# Altium PCB 基于STM32的DDS信号源的设计实例.PcbDoc
Units mil, origin at the board's own origin, x right, y up, seen from the top; angles counter-clockwise.
Board outline 3937.01 x 2755.91 mil, 2 copper layers (Top Layer, Bottom Layer); 61 components, 55 nets, 261 pads, 44 vias.
Unrouted connection lines stored in the file: 3.
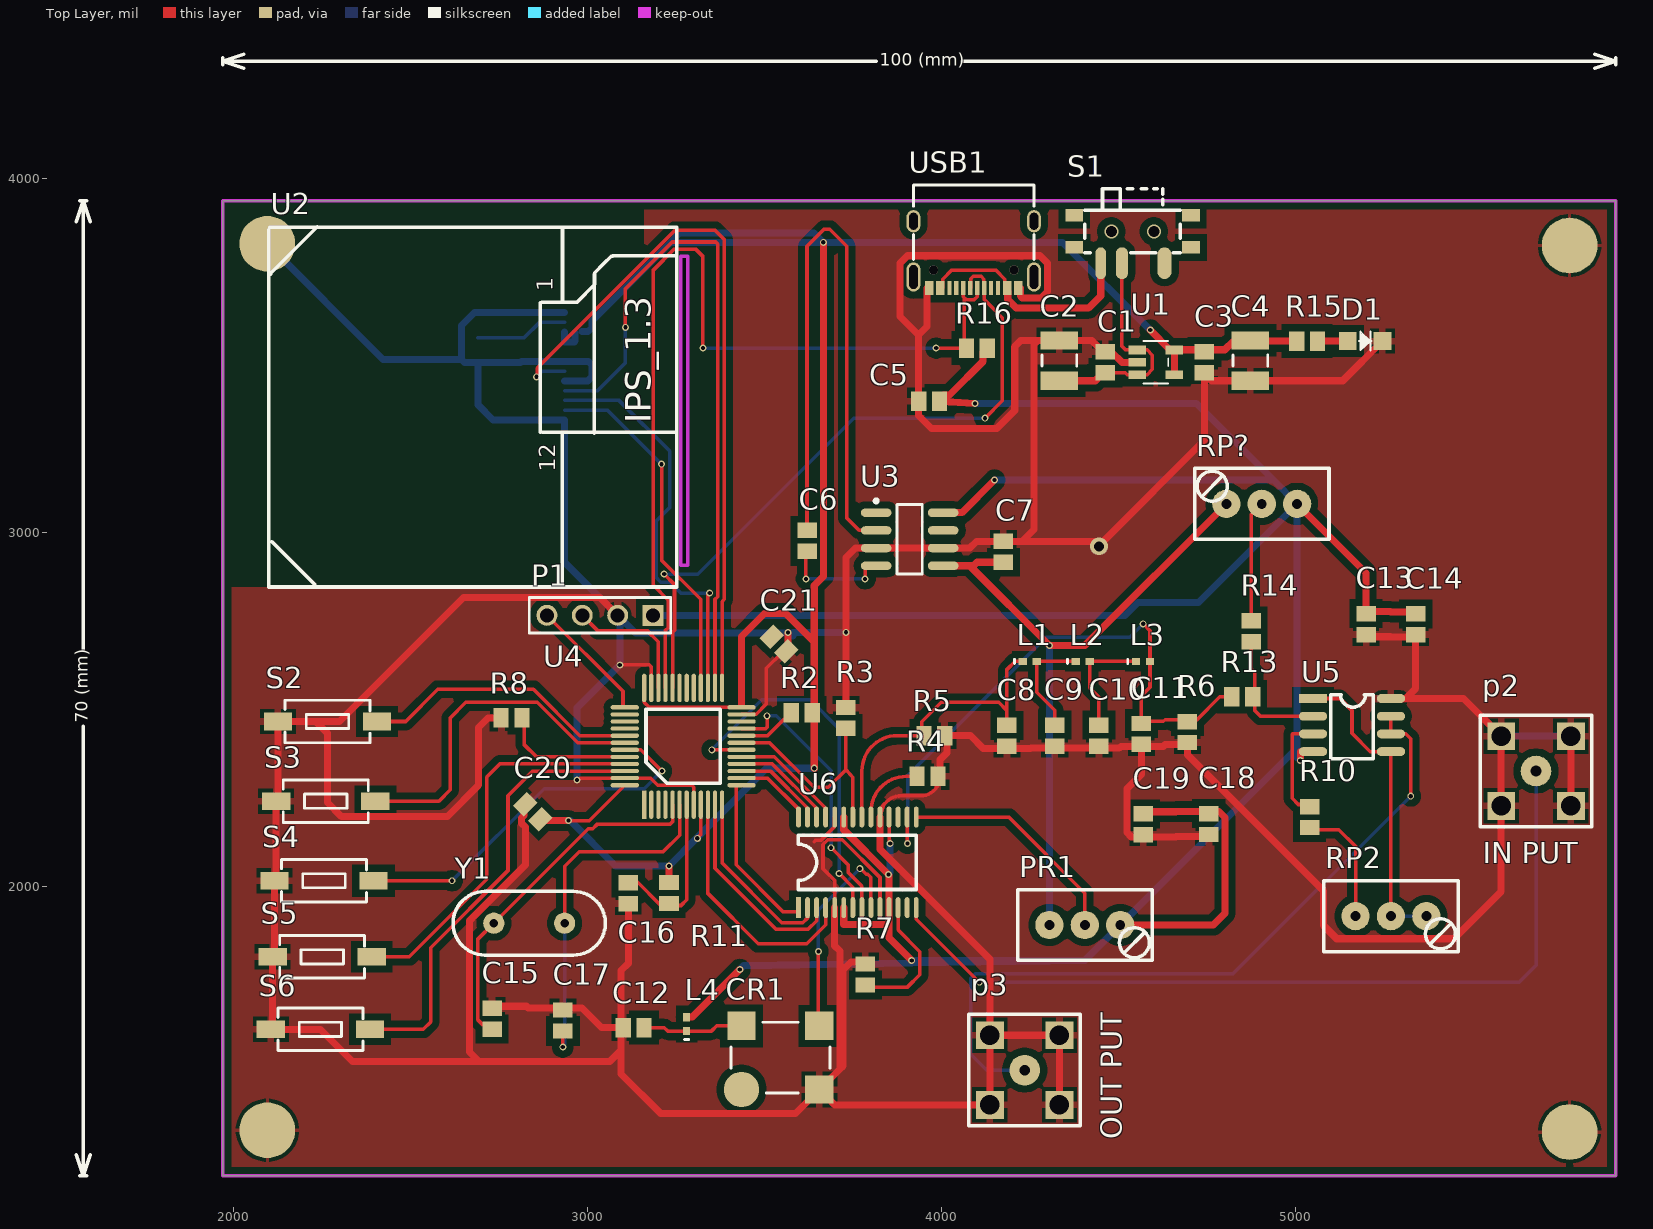
[diagram p0: Top Layer view]
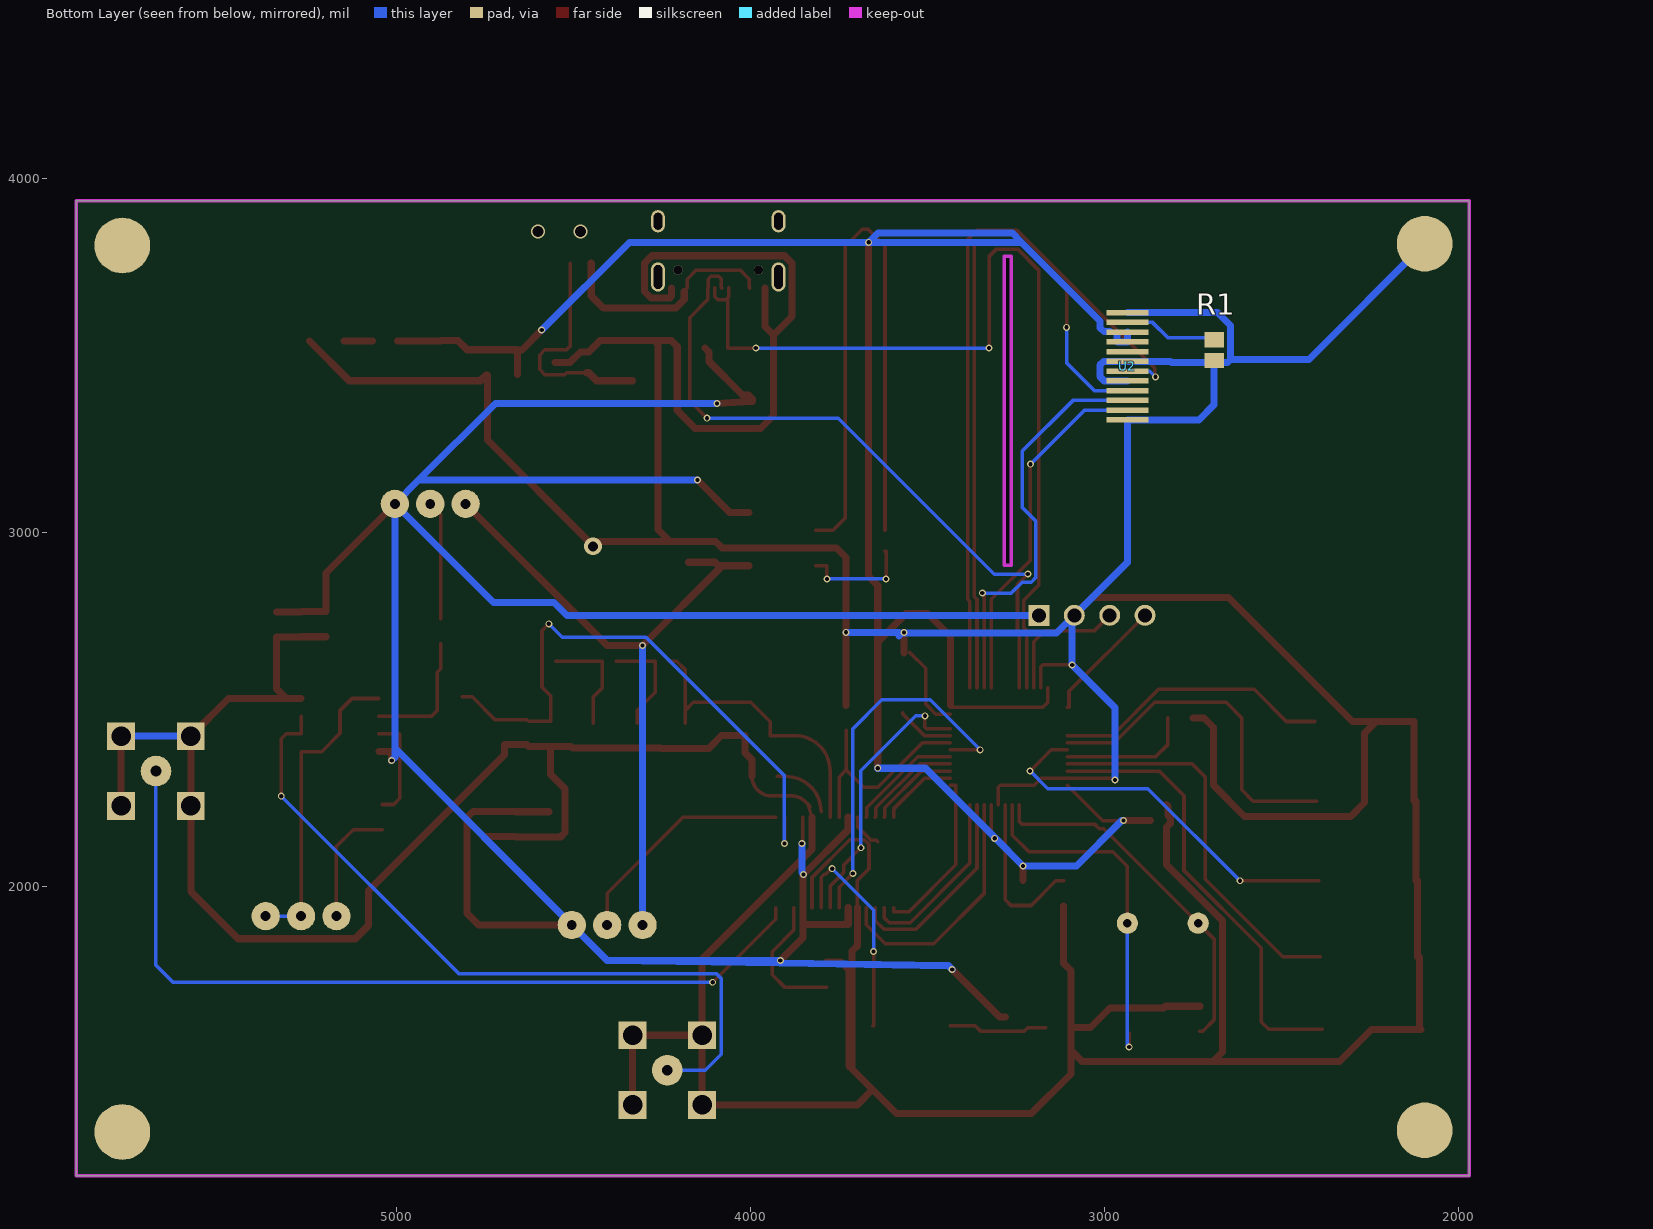
[diagram p1: Bottom Layer view, seen from below]

## Layer stack, top to bottom
Top Solder: solder mask 0.4, Solder Resist, Dk 3.5
Top Layer: signal copper 1.4
Dielectric 1: dielectric 12.6, FR-4, Dk 4.8
Bottom Layer: signal copper 1.4
Bottom Solder: solder mask 0.4, Solder Resist, Dk 3.5

## Board outline
1968.5,1181.1 1968.5,3937.01 5905.51,3937.01 5905.51,1181.1
cut-out: 3264.08,2905.92 3284.08,2905.92 3284.08,3779.54 3285,3780 3264.08,3780

## Design rules (kind name [scope] priority, off if disabled: settings)
Clearance Clearance_PL [InPolygon] p1: gap=20 ignorepadtopadclearanceinfootprint=FALSE
Clearance [All] p2: gap=8 ignorepadtopadclearanceinfootprint=FALSE
PolygonConnect PolygonConnect_VIA [IsVia] p1: connectstyle=Direct reliefconductorwidth=10 reliefentries=4 polygonreliefangle="90 Angle" airgapwidth=10
PolygonConnect [All] p2: connectstyle=Relief reliefconductorwidth=20 reliefentries=4 polygonreliefangle="90 Angle" airgapwidth=10
RoutingVias [All] p1: holewidth=11.81 width=19.68 viastyle="Through Hole" minholewidth=11.81 minwidth=19.68 maxholewidth=11.81 maxwidth=19.68
SolderMaskExpansion [All] p1: expansion=4 istentingtop=FALSE
SupplyNets "Schematic Supply Nets_4" [InNet('+5')] p1: voltage=0.000
SupplyNets "Schematic Supply Nets_3" [InNet('-5')] p2: voltage=0.000
SupplyNets "Schematic Supply Nets_2" [InNet('GND')] p3: voltage=0.000
SupplyNets "Schematic Supply Nets_1" [InNet('VCC')] p4: voltage=0.000
SupplyNets "Schematic Supply Nets" [InNet('+5VIN')] p5: voltage=0.000
Width Width_+5VIN [InNet('+5VIN')] p1: maxlimit=100 minlimit=10 preferedwidth=10 minimp=50.000000 maximp=50.000000 favimp=50.000000
Width Width_-5 [InNet('-5')] p2: maxlimit=100 minlimit=10 preferedwidth=20 minimp=50.000000 maximp=50.000000 favimp=50.000000
Width Width_+5 [InNet('+5')] p3: maxlimit=100 minlimit=10 preferedwidth=20 minimp=50.000000 maximp=50.000000 favimp=50.000000
Width Width_GND [InNet('GND')] p4: maxlimit=100 minlimit=10 preferedwidth=10 minimp=50.000000 maximp=50.000000 favimp=50.000000
Width Width_VCC [InNet('VCC')] p5: maxlimit=100 minlimit=10 preferedwidth=10 minimp=50.000000 maximp=50.000000 favimp=50.000000
Width [All] p6: maxlimit=100 minlimit=5 preferedwidth=10 minimp=50.000000 maximp=50.000000 favimp=50.000000
30 further rules are at their usual default settings.

## Components (designator, comment, footprint, x,y, rotation, side; value= is the part's Value field where it differs from the comment)
C1 "Cap" C0805 4463,3480 r90 top value=104
C2 "Cap Pol1" C1210_N 4333,3485 r90 top value=22UF
C3 "Cap" C0805 4743,3480 r270 top value=104
C4 "Cap Pol1" C1210_N 4873,3485 r270 top value=22UF
C5 "Cap" C0805 3965,3370 r180 top value=106
C6 "Cap" C0805 3620,2975.47 r270 top value=106
C7 "Cap" C0805 4175,2944.53 r90 top value=106
C8 "Cap" C0805 4185,2424.57 r90 top value=33pF
C9 "Cap" C0805 4320,2425 r90 top value=22pF
C10 "Cap" C0805 4445,2425 r90 top value=22pF
C11 "Cap" C0805 4565,2430 r90 top value=22pF
C12 "Cap" C0805 3130,1600 r0 top value=104
C13 "Cap" C0805 5200,2740 r90 top value=106
C14 "Cap" C0805 5340,2739.57 r90 top value=104
C15 "Cap" C0805 2730,1625 r270 top value=20pF
C16 "Cap" C0805 3115,1979.57 r90 top value=104
C17 "Cap" C0805 2930,1620 r90 top value=20pF
C18 "Cap" C0805 4755,2175 r90 top value=104
C19 "Cap" C0805 4570,2174.57 r90 top value=106
C20 "Cap" C0805 2845,2210 r315 top value=104
C21 "Cap" C0805 3540.88,2684.12 r135 top value=104
CR1 "30MHZ" CRYSTAL-SMT-5X7 3435,1425 r0 top
D1 "LED2" D0805+ 5148,3540 r0 top
L1 "Inductor" 0402-A 4249.5,2635 r0 top value=470mH
L2 "Inductor" 0402-A 4399.5,2635 r0 top value=390mH
L3 "Inductor" 0402-A 4569.5,2635 r0 top value=390mH
L4 "Inductor" 0402-A 3280,1610 r90 top
P1 "Header 4" HDR1X4 3185,2765 r180 top
p2 "SMA" SMA-KE 5680,2325 r0 top
p3 "SMA" SMA-KE 4235,1480 r0 top
PR1 "POT2" VR7 4405,1890 r0 top
R1 "Res2" C0805 2690,3514.57 r90 bottom value=10
R2 "Res2" C0805 3605,2490 r180 top value=10K
R3 "Res2" C0805 3730,2475 r90 top value=10K
R4 "Res2" C0805 3960.43,2310 r180 top value=24
R5 "Res2" C0805 3980,2425 r180 top value=200
R6 "Res2" C0805 4695,2435 r90 top value=200
R7 "Res2" C0805 3785,1750 r90 top value=3.9K
R8 "Res2" C0805 2785,2475 r180 top value=10K
R10 "Res2" C0805 5040,2195 r90 top value=49.9
R11 "Res2" C0805 3230,1980.43 r90 top value=10K
R13 "Res2" C0805 4850,2535 r180 top value=49.9
R14 "Res2" C0805 4875,2720 r90 top value=49.9
R15 "Res2" C0805 5033,3540 r180 top value=10K
R16 "Res2" C0805 4100,3520 r0 top value=10K
RP2 "POT2" VR7 5270,1915 r0 top
RP? "POT2" VR7 4905,3080 r180 top
S1 "SW-SPDT" SW-SPDT-7P 4450,3760 r0 top
S2 "KEY" SW-MINI 2145,2465 r0 top
S3 "KEY" SW-MINI 2140,2240 r0 top
S4 "KEY" SW-MINI 2135,2015 r0 top
S5 "KEY" SW-MINI 2130,1800 r0 top
S6 "KEY" SW-MINI 2125,1595 r0 top
U1 "XC6219B332" SOT23-5L 4553,3480 r270 top
U2 "1.3寸TFT液晶" 1.3-TFT-TPS 2934.7,3620.61 r0 top
U3 "ICL7660" SO8_N 3910,2980 r0 top
U4 "STM32F103C8" TQFP-48 3160,2230 r90 top
U5 "OPA269" SO-8 5050,2530 r0 top
U6 "AD9851" TSSOP28 3595.87,1939.09 r90 top
USB1 "TYPE-C" TYPE-C 3920.83,3878.58 r0 top
Y1 "XTAL" XTAL2 2835,1895 r180 top

## Footprints (in the part's own frame and the unit in brackets; to place one, negate y for a bottom-side part, rotate by r counter-clockwise, add the part's x,y. Pads: shape width x height; smd on the part's side, far side on the other; paste and mask are expansions set on the pad)
1.3-TFT-TPS [mm]
  rect 3x0.4 smd far side: 1(0,0) 2(0.008,-0.709) 3(0.008,-1.409) 4(0.008,-2.109) 5(0.008,-2.809) 6(0.008,-3.509) 7(0.008,-4.209) 8(0.008,-4.909) 9(0.008,-5.609) 10(0.008,-6.309) 11(0.008,-7.009) 12(0.008,-7.709)
  Keep-Out Layer lines w0.254: 8.339,-18.123 8.339,4.051 8.847,4.051 8.847,-18.123 8.339,-18.123
  silkscreen extent -21.22,-19.72 8.06,6.16
0402-A [mm] "Chip Inductor, Body 1.0x0.5mm, IPC High Density"
  rect 0.6x0.5 smd: 1(-0.5,0) 2(0.5,0)
  silkscreen extent -1.1,-0.15 -1.1,0.15, body extent -0.55,-0.3 0.55,0.3, height 0.55
C0805 [mm] "Chip Capacitor, Body 2.0x1.3mm, IPC High Density"
  rect 1.1x1.4 smd: 1(-0.75,0) 2(0.75,0)
  body extent -1.1,-0.72 1.1,0.72, height 1.4
C1210_N [mm] "Chip Capacitor, Body 3.2x2.5mm, IPC Medium Density"
  rect 1.3x2.7 smd: 1(-1.45,0) 2(1.45,0)
  silkscreen extent -0.4,-1.25 0.4,1.25, body extent -1.7,-1.35 1.7,1.35, height 1.5
CRYSTAL-SMT-5X7 [mil]
  round 100 smd: 1(0,0)
  rect 80x80 smd: 4(220,0) 5(220,180) 8(0,180)
  silkscreen extent -30,-10 250,190
D0805+ [mil]
  rect 50x50 smd: A(0,0) K(98,0)
  silkscreen extent 31,-27 68,27
HDR1X4 [mm]
  rect 1.5x1.5 hole 1 paste-2539.97: 1(0,0)
  round 1.5 hole 1 paste-2539.97: 2(2.54,0) 3(5.08,0) 4(7.62,0)
  silkscreen extent -1.27,-1.27 8.89,1.27
SMA-KE [mm]
  round 2.2 hole 0.762: 1(0,0)
  rect 2x2 hole 1.4: 2(2.5,2.5) 3(2.5,-2.5) 4(-2.5,-2.5) 5(-2.5,2.5)
  silkscreen extent -4,-4 4,4
SO8_N [mm] "SOIC, 8-Leads, Body 4.9x3.9mm, Pitch 1.27mm, IPC Medium Density"
  oval 2.2x0.6 smd: 1(-2.4,1.905) 2(-2.4,0.635) 3(-2.4,-0.635) 4(-2.4,-1.905) 5(2.4,-1.905) 6(2.4,-0.635) 7(2.4,0.635) 8(2.4,1.905)
  silkscreen extent -2.52,-2.5 0.9,2.88, body extent -2,-2.5 2,2.5, height 1.75
SO-8 [mil]
  rect 80x25 / inner round 60 / far side round 0 all layers, no hole: 1(0,0)
  oval 80x25 / inner round 60 / far side round 0 all layers, no hole: 2(0,-50) 3(0,-100) 4(0,-150) 5(220,-150) 6(220,-100) 7(220,-50) 8(220,0)
  silkscreen extent 50,-170 170,11
SOT23-5L [mil]
  rect 25x50 smd: 1(-35,0) 2(0,0) 3(35,0) 4(35,105) 5(-35,105)
  silkscreen extent -60,18 60,88
SW-MINI [mil]
  rect 80x50 smd: 1(-20,0) 2(260,0)
  silkscreen extent 0,-60 240,60
SW-SPDT-7P [mil]
  oval 30x90 smd: 1(0,0)
  oval 35x90 smd: 2(60,0)
  oval 40x90 smd: 3(180,0)
  rect 50x35 smd: 4(255,45) 5(255,135) 6(-75,135) 7(-75,45)
  silkscreen extent -45,30 225,210
TQFP-48 [mil]
  rect 80x12 smd: 1(0,0)
  oval 80x12 smd: 2(0,-20) 3(0,-40) 4(0,-60) 5(0,-80) 6(0,-100) 7(0,-120) 8(0,-140) 9(0,-160) 10(0,-180) 11(0,-200) 12(0,-220) 25(330,-220) 26(330,-200) 27(330,-180) 28(330,-160) 29(330,-140) 30(330,-120) 31(330,-100) 32(330,-80) 33(330,-60) 34(330,-40) 35(330,-20) 36(330,0)
  oval 12x80 smd: 13(55,-275) 14(75,-275) 15(95,-275) 16(115,-275) 17(135,-275) 18(155,-275) 19(175,-275) 20(195,-275) 21(215,-275) 22(235,-275) 23(255,-275) 24(275,-275) 37(275,55) 38(255,55) 39(235,55) 40(215,55) 41(195,55) 42(175,55) 43(155,55) 44(135,55) 45(115,55) 46(95,55) 47(75,55) 48(55,55)
  silkscreen extent 60,-215 270,-5
TSSOP28 [mm]
  rect 1.5x0.35 / inner round 1.524 / far side round 0 all layers, no hole: 1(0,0)
  oval 1.5x0.35 / inner round 1.524 / far side round 0 all layers, no hole: 2(0,-0.65) 3(0,-1.3) 4(0,-1.95) 5(0,-2.6) 6(0,-3.25) 7(0,-3.9) 8(0,-4.55) 9(0,-5.2) 10(0,-5.85) 11(0,-6.5) 12(0,-7.15) 13(0,-7.8) 14(0,-8.45) 15(6.5,-8.45) 16(6.5,-7.8) 17(6.5,-7.15) 18(6.5,-6.5) 19(6.5,-5.85) 20(6.5,-5.2) 21(6.5,-4.55) 22(6.5,-3.9) 23(6.5,-3.25) 24(6.5,-2.6) 25(6.5,-1.95) 26(6.5,-1.3) 27(6.5,-0.65) 28(6.5,0)
  silkscreen extent 1.3,-8.45 5.2,0
TYPE-C [mm]
  round 0.65 hole 0.65: 0(1.435,-3.5) 0(7.215,-3.5)
  oval 1x1.6 hole 0.6 slot 1.2 at 90 deg: 1(0,0) 2(8.65,0)
  oval 1x2.1 hole 0.6 slot 1.7 at 90 deg: 3(8.65,-4) 4(0,-4)
  rect 0.3x1 smd: A1(7.675,-4.79) A4(6.875,-4.79) A5(5.575,-4.79) A6(4.575,-4.79) A7(4.075,-4.79) A8(3.075,-4.79) A9(1.775,-4.79) A12(0.975,-4.79) B1(1.275,-4.79) B4(2.075,-4.79) B5(2.575,-4.79) B6(3.575,-4.79) B7(5.075,-4.79) B8(6.075,-4.79) B9(6.575,-4.79) B12(7.375,-4.79)
  silkscreen extent 0,-2.74 8.65,2.6
VR7 [mil]
  round 80 hole 28: 1(-100,0) 2(100,0) 3(0,0)
  silkscreen extent -190,-100 190,100
XTAL2 [mil]
  round 60 hole 24: 1(-100,0) 2(100,0)
  silkscreen extent -215,-90 215,90

## Part data
C1 C3 C5 C6 C7 C8 C9 C10 C11 C12 C13 C14 C15 C16 C17 C18 C19 C20 C21: "Capacitor", LatestRevisionDate=17-Jul-2002, LatestRevisionNote="Re-released for DXP Platform.", PackageDescription="Radial Cap, Thru-Hole; 2 Leads; 0.3 in Pin Spacing", PackageReference=RAD-0.3, Published=8-Jun-2000, Publisher="Altium Limited"
C2 C4: "Polarized Capacitor (Radial)", LatestRevisionDate=17-Jul-2002, LatestRevisionNote="Re-released for DXP Platform.", PackageDescription="Polarized Capacitor (Radial); 2 Leads", PackageReference=RB7.6-15, Published=8-Jun-2000, Publisher="Altium Limited"
CR1: library part CRYSTAL-DIP8
D1: "Typical RED, GREEN, YELLOW, AMBER GaAs LED", LatestRevisionDate=17-Jul-2002, LatestRevisionNote="Re-released for DXP Platform.", PackageDescription="SM LED; 2 Flat Leads", PackageReference=3.2X1.6X1.1, PackageVersion=Feb-2002, Published=8-Jun-2000, Publisher="Altium Limited"
P1: "Header, 4-Pin", LatestRevisionDate=17-Jul-2002, LatestRevisionNote="Re-released for DXP Platform.", Publisher="Altium Limited"
PR1 RP2 RP?: "Potentiometer"
R1 R2 R3 R4 R5 R6 R7 R8 R10 R11 R13 R14 R15 R16: "Resistor", LatestRevisionDate=17-Jul-2002, LatestRevisionNote="Re-released for DXP Platform.", PackageDescription="Axial Device, Thru-Hole; 2 Leads; 0.4 in Pin Spacing", PackageReference=AXIAL-0.4, Published=8-Jun-2000, Publisher="Altium Limited"
S1: "SPDT Subminiature Toggle Switch, Right Angle Mounting, Vertical Actuation", ComponentLink1Description="Manufacturer Link", ComponentLink1URL=http://www.apem.com, DatasheetVersion=05-Dec-2000, LatestRevisionDate=17-Dec-2003, LatestRevisionNote="Schematic revised, PCB Footprint replaced.", PackageDescription="Switch; 4 Leads", PackageReference=TL36WW15050, Published=24-Mar-1999, Publisher="Altium Limited"
S2 S3 S4 S5 S6: library part SW-PB, "Switch", LatestRevisionDate=17-Jul-2002, LatestRevisionNote="Re-released for DXP Platform.", PackageDescription="Switch; 2 Leads", PackageReference=SPST-2, Published=24-Mar-1999, Publisher="Altium Limited"
U1: library part XC6219
U4: "Flaah:64/RAM:20/IO:36", BOM名称=32位STM单片机, 学习资源=www.ooocke.com, 版权归属=源创客
Y1: "Crystal Oscillator", LatestRevisionDate=17-Jul-2002, LatestRevisionNote="Re-released for DXP Platform.", PackageDescription="Crystal, Thru-Hole; 2 Leads; Body 3.1 x 8.2 mm (Dia.xH)", PackageReference=R38, Published=8-Jun-2000, Publisher="Altium Limited"
L1 L2 L3 L4: Code_IEC=1005, Code_JEITA=0402, LatestRevisionDate=29-May-2009, LatestRevisionNote="IPC-7351 Footprint Added.", PackageDescription="Chip Inductor", PackageReference=0402-A, Published=8-Jun-2000, Publisher="Altium Limited"

## Free pads (board coordinates)
  round 157.48 all layers, no hole paste-99999: 3(2095,1310) 3(2095,3815) 3(5775,1305) 3(5775,3810)

## Via types
v1: diameter 19.68, hole 11.81, Top Layer to Bottom Layer, 41 vias
v2: diameter 39.37, hole 31.5, Top Layer to Bottom Layer, 2 vias
v3: diameter 50, hole 28, Top Layer to Bottom Layer, 1 vias

## Nets (pads, with @x,y where several pads share a name; then routed paths per layer and width w, separated by ;. In a path a pad name is that pad's centre, name@x,y a point inside that pad or via, vN(x,y) a via of type N, cw(c..) or ccw(c..) an arc to the next point about the centre after c; other vN are vias at no path point)
+5: C5.1 C13.2 C14.2 C18.2 C19.2 L4.2 P1.1 PR1.2 R16.2 RP?.1 U3.8 U5.4 U6.6 U6.11 U6.18 U6.23 | length 9748.3
  Top Layer w10: U6.18 3851.77,2130.08 3853.15,2128.7 3853.15,2121.85 v1(3855,2120)
  Top Layer w20: L4.2 3295.69,1629.69 v1(3430,1764) ; U6.6 3723.82,1891 3851.77,1891 ; U6.23 3723.82,2159.18 3851.77,2031.23 U6.11 3851.77,1891 ; v1(3915.77,1790) 3851.77,1854 3851.77,1891 ; U3.8 4058,3055 v1(4150,3147) ; v1(4095,3364) C5.1 3994.53,3375.91 4006.18,3387.56 4022.56,3387.56 4117.87,3482.87 4117.87,3509.47 R16.2@4128.41,3520 ; PR1.2 4768,1890 4801,1923 4801,2193.43 4784,2210.43 4755,2210.43 4662.43,2210.43 4662,2210 C19.2@4570,2210 ; RP?.1 5200,2885 5200,2775.43 5269,2775.43 5269.43,2775 C14.2@5340,2775 ; v1(5014,2355) 5014,2380 U5.4
  Bottom Layer w20: P1.1 4519,2765 4555,2801 4726,2801 RP?.1 ; v1(3430,1764) 3440.84,1774.84 3915.89,1782.31 4405,1790 ; v1(3849.82,2032.79) 3854.82,2037.79 3854.82,2079.82 3855,2080 v1(3855,2120) ; v1(3915.77,1790) 4405,1790 ; v1(4095,3364) 4721,3364 4938,3147 ; v1(4150,3147) 4938,3147 ; v1(5014,2355) 5005,2364 5005,2390 ; 4405,1790 PR1.2 5005,2390 ; 4938,3147 RP?.1 ; 5005,2390 RP?.1
+5VIN: S1.1 USB1.A4 USB1.A9 USB1.B4 USB1.B9 | length 648.9
  Top Layer w10: USB1.B4 4003.3,3690.78 4003.3,3715.07 4028.92,3740.69 4153.29,3740.69 4178.91,3715.07 4178.91,3690.78 USB1.B9
  Top Layer w20: USB1.A4@4187.28,3680 4187.28,3657.72 4211.24,3633.76 4416,3633.76 4450,3667.76 S1.1
-5: C7.1 PR1.1 RP?.2 U3.5 | length 1948.5
  Top Layer w20: U3.5 4080,2905 ; C7.1 4100,2915 4090,2905 4080,2905 ; RP?.2 4405,2680 v1(4305,2680) 4080,2905
  Bottom Layer w20: PR1.1 v1(4305,2680)
AD9850-D0: U4.10 U6.4 | length 713.1
  Top Layer w10: U4.10 3340,1979 3482,1837 3619,1837 3672.64,1890.64 U6.4
AD9850-D1: U4.11 U6.3 | length 584.8
  Top Layer w10: U4.11 3360,2050 3531.43,1878.57 3623.57,1878.57 3647.05,1902.05 U6.3
AD9850-D2: U4.12 U6.2 | length 511
  Top Layer w10: U4.12 3380,2065 3548.43,1896.57 3608.14,1896.57 3621.46,1909.88 U6.2
AD9850-D3: U4.13 U6.1 | length 483.2
  Top Layer w10: U4.13 3420,2285 3420,2060 3553.11,1926.89 3595.87,1926.89 U6.1
AD9850-D4: U4.14 U6.28 | length 219.7
  Top Layer w10: U4.14 3508.5,2305 3595.87,2217.64 U6.28
AD9850-D5: U4.15 U6.27 | length 255.1
  Top Layer w10: U4.15 3516.63,2325 3620.73,2220.9 3620.73,2195.72 U6.27
AD9850-D6: U4.16 U6.26 | length 288.9
  Top Layer w10: U4.16 3522.22,2345 3646.32,2220.9 3646.32,2195.72 U6.26
AD9850-D7: U4.17 U6.25 | length 322.8
  Top Layer w10: U4.17 3527.81,2365 3671.91,2220.9 3671.91,2195.72 U6.25
D/C: U2.7 U4.25 | length 2080.7
  Top Layer w10: v1(2856,3439) 2857.85,3440.85 2857.85,3463.76 3247.09,3853 3360,3853 3386,3827 3386,2810 3380,2804 U4.25
  Bottom Layer w10: v1(2856,3439) 2871.88,3454.88 U2.7
D\D\S\R\S\T\: R3.1 U4.19 U6.22 | length 619.8
  Top Layer w10: U4.19 3514,2405 3640,2279 3680,2279 3730,2329 ; R3.1@3730,2439.57 3730,2329 ; U6.22 3749.41,2307 3730,2329
DDSFQUP: U4.21 U6.8 | length 773.8
  Top Layer w10: U4.21 3503,2445 3507,2449 v1(3507,2481) ; v1(3688,2108.27) 3735.93,2060.34 3735.93,2039.07 3775,2000 U6.8
  Bottom Layer w10: v1(3507,2481) 3533,2481 3688,2326 v1(3688,2108.27)
DDSWCLK: U4.18 U6.7 | length 1057.2
  Top Layer w10: v1(3351,2385) U4.18 ; v1(3711,2035.41) 3749.41,1997 U6.7
  Bottom Layer w10: v1(3351,2385) 3492,2526 3629,2526 3711,2444 v1(3711,2035.41)
FOUT: C11.2 L3.2 R6.2 R13.2 U6.16 | length 1682.8
  Top Layer w10: U6.16 3902.95,2121.05 v1(3904,2120) ; v1(4570,2741) 4589.19,2721.81 L3.2 4589.19,2562.19 4565,2538 4565,2465.43 4627,2465.43 4632,2470.43 4695,2470.43 4722,2470.43 4786.57,2535 R13.2@4814.57,2535
  Bottom Layer w10: v1(3904,2120) 3904,2311.53 4295.47,2703 4532,2703 v1(4570,2741)
GND: C1.2 C2.2 C3.2 C4.2 C5.2 C7.2 C8.1 C9.1 C10.1 C11.1 C12.1 C13.1 C14.1 C15.1 C16.1 C17.2 C18.1 C19.1 C20.1 C21.1 CR1.4 D1.K P1.2 p2.2 p2.3 p2.4 p2.5 p3.2 p3.3 p3.4 p3.5 pad.3 R1.1 R3.2 R4.1 R5.1 R6.1 R7.2 R8.2 S2.1 S3.1 S4.1 S5.1 S6.1 U1.2 U2.1 U2.5 U2.6 U2.8 U2.12 U3.3 U3.6 U4.8 U4.23 U4.35 U4.47 U5.8 U6.5 U6.10 U6.19 U6.24 USB1.A1 USB1.A12 USB1.B1 USB1.B12 | length 23564.8
  Top Layer w10: v1(2970,2300) 2972.62,2300 2977.62,2305 U4.47 3178.27,2305 3198.27,2285 3294.14,2285 3300,2279.14 U4.8 ; v1(3091,2625) 3174.14,2625 3180,2619.14 U4.35 ; U4.23 3435.38,2485.38 3476.25,2485.38 3505.18,2514.31 3505.18,2615.07 C21.1@3550.05,2659.95 ; 3640,2125 3645,2130 3660,2130 3697.5,2167.5 3697.5,2194.28 U6.24 ; U6.5 3698.23,2015.88 3665.16,2048.95 3665.16,2117.74 3678.54,2131.12 3719.36,2131.12 3826.18,2024.29 U6.10 ; U6.19 3834.64,2221.36 3838.08,2232.06 ; 3832.38,2222.08 cw(c3851.77,2217.64) 3838.08,2232.06 ; R4.1@3995.87,2310 cw(c3940.87,2310) 3940.87,2255 3886.18,2255 ccw(c3886.18,2195) 3844.84,2238.48 3838.08,2232.06
  Top Layer w20: S6.1 S6.1@2110,1595 ; C15.1@2730,1660.43 2827,1660.43 2832,1655.43 2984,1655.43 3039.43,1600 C12.1@3094.57,1600 ; R8.2@2749.57,2475 2719,2475 2692,2448 2692,2285 2604,2197 2304,2197 2265,2236 2265,2432 2232,2465 ; C20.1 2819.95,2226.7 2819.95,2199.27 2813.08,2192.4 2813.08,2177.49 2824.12,2166.45 2824.12,2060.12 2666,1902 2666,1531 2693,1504 ; P1.2 3035,2815 2649,2815 2299,2465 2232,2465 ; C16.1@3115,1944.13 3115,1781.43 3094.57,1761 C12.1@3094.57,1600 ; C21.1@3565.93,2659.07 v1(3565.93,2716.12) ; U6.5 3698.23,1831 3713,1816.23 3713,1483 ; R3.2@3730,2510.43 v1(3730,2717) 3730,2928 3757,2955 U3.3 U3.6 4080,2955 4099.06,2974.06 C7.2 4227.06,2974.06 ; R7.2@3785,1785.43 3744,1785.43 3721,1762.43 3721,1491 3713,1483 ; U6.19 3826.18,2103.82 4136.57,1793.43 p3.5 ; USB1.A12 3959.21,3581 3935.47,3557.26 3935.47,3557 ; R4.1@3995.87,2310 3995.87,2357 4015.43,2376.57 4015.43,2425 4082,2425 4117.87,2389.13 4252,2389.13 4252.43,2389.57 4502,2389.57 4507,2394.57 C11.1@4565,2394.57 ; USB1.A1 4222.99,3666.77 4228,3661.76 4280.83,3661.76 4299.06,3680 4299.06,3760 4278.06,3781 3904,3781 3883,3760 3883,3609.47 3935.47,3557 ; p3.3 p3.2 p3.5 ; U1.2 4509.9,3480 4480.37,3509.53 C1.2 4457.09,3509.53 4424.54,3542.09 C2.2 4272,3542.09 ; C18.1@4755,2139.57 4662.43,2139.57 4662,2139.13 4536,2139.13 4524,2151.13 4524,2275 4565,2316 C11.1@4565,2394.57 ; C13.1@5200,2704.57 5269,2704.57 5269.43,2704.13 5340,2704.13 5340,2558 5312,2530 ; D1.K 5133.91,3427.91 C4.2 4763.59,3427.91 4746.94,3444.57 4743,3444.57 4743,3260 4457.06,2974.06 4227.06,2974.06 ; U5.8 5312,2530 ; p2.3 p2.2 ; S6.1@2110,1595 S5.1 2115,1800 S4.1 2120,2015 S3.1 2125,2240 S2.1 2232,2465 ; S6.1@2110,1595 2245,1595 2336,1504 2693,1504 ; 2693,1504 3062.57,1504 3094.57,1536 ; 3094.57,1536 C12.1@3094.57,1600 ; 3094.57,1536 3094.57,1469 3206.57,1357 3587,1357 CR1.4 ; CR1.4 3713,1483 ; CR1.4 3698.43,1381.57 p3.4 p3.5 ; 3935.47,3557 C5.2 3935.47,3329.53 3971.74,3293.26 4156.26,3293.26 4206.95,3343.95 4206.95,3525.03 4224,3542.09 4272,3542.09 ; 4227.06,2974.06 4261,3008 4261,3531.09 4272,3542.09 ; C11.1@4565,2394.57 4627,2394.57 4632,2399.57 4695,2399.57 4695,2371 5080,1986 5080,1888 5117,1851 5448,1851 5581.57,1984.57 p2.4 p2.5 5475,2530 5312,2530
  Bottom Layer w20: pad.3@2095,3815 2422,3488 2644,3488 ; U2.1 2680.61,3620.61 2644,3584 2644,3488 ; U2.8 3000.32,3427.32 3013,3440 3013,3472 3002.56,3482.44 U2.6 2813.31,3482.44 2810,3479.13 R1.1@2690,3479.13 ; v1(2970,2300) 2970,2504 v1(3091,2625) 3091,2759 P1.2 ; 3580.05,2707 3572.05,2715 3135,2715 P1.2 ; 3580.05,2717 v1(3730,2717) ; p2.5 p2.2 ; 2644,3488 2652.87,3479.13 R1.1@2690,3479.13 ; R1.1@2690,3479.13 2690,3360 2732.91,3317.09 U2.12 2935,2915 P1.2
  other v3: 4445,2960
IOUTA: C8.2 L1.1 R5.2 U6.21 | length 874.7
  Top Layer w10: U6.21 3775,2325 cw(c3875,2325) 3875,2425 3944.57,2425 3944.57,2464 3999.57,2519 4162,2519 4185,2496 ; C8.2@4185,2460 4185,2496 ; L1.1 4208,2635 4185,2612 4185,2496
IOUTB: R4.2 U6.20 | length 181.5
  Top Layer w10: U6.20@3800.59,2210 cw(c3900.59,2210) 3900.59,2310 R4.2@3925,2310
KEY1: S2.2 U4.41 | length 792
  Top Layer w10: S2.2 2486,2465 2577,2556 2847,2556 2978,2425 U4.41
KEY2: S3.2 U4.42 | length 986.7
  Top Layer w10: S3.2 2580,2240 2612,2272 2612,2475 2656,2519 2858,2519 2972,2405 U4.42
KEY3: S4.2 U4.43 | length 1073.3
  Top Layer w10: S4.2 v1(2617,2015) ; U4.43 3150,2385 v1(3210,2325)
  Bottom Layer w10: v1(2617,2015) 2877,2275 3160,2275 v1(3210,2325)
KEY4: S5.2 U4.45 | length 1110
  Top Layer w10: S5.2 2496,1800 2715,2019 2715,2308 2752,2345 U4.45
KEY5: S6.2 U4.46 | length 1269
  Top Layer w10: S6.2 2536,1595 2557,1616 2557,1826 2775,2044 2775,2255 2845,2325 U4.46
NetC1_1: C1.1 C2.1 S1.2 U1.1 U1.3 | length 652.1
  Top Layer w10: C1.1 4519.57,3450.47 4525.04,3445 U1.3 4580.96,3445 4596,3460.04 4596,3499.96 4580.96,3515 U1.1 4520,3515 4510,3525 S1.2
  Top Layer w20: C2.1 4434.54,3427.91 4457.09,3450.47 C1.1
NetC6_1: C6.1 U3.2 | length 1820.8
  Top Layer w10: C6.1 3620,3808 3668,3856 3684,3856 3732,3808 3732,3040 3767,3005 U3.2
NetC6_2: C6.2 U3.4 | length 316.5
  Top Layer w10: v1(3617,2868) 3617,2945.94 C6.2 ; v1(3784,2868) 3784,2905 U3.4
  Bottom Layer w10: v1(3617,2868) v1(3784,2868)
NetC9_2: C9.2 L1.2 L2.1 | length 306.2
  Top Layer w10: C9.2@4320,2460.43 4320,2497.19 4269.19,2548 L1.2 L2.1
NetC10_2: C10.2 L2.2 L3.1 | length 315.9
  Top Layer w10: C10.2@4445,2460.43 4445,2534 4419.19,2559.81 L2.2 L3.1
NetC12_2: C12.2 CR1.8 L4.1 | length 279.7
  Top Layer w10: C12.2@3165.43,1600 3217,1600 3226.68,1590.32 L4.1 3350,1590.32 3364.68,1605 CR1.8
NetD1_A: D1.A R15.1 | length 79.6
  Top Layer w20: R15.1@5068.43,3540 D1.A
Netp2_1: p2.1 U6.14 | length 2426.7
  Top Layer w10: U6.14 3928.54,1906.46 v1(4106.86,1728.14)
  Bottom Layer w10: v1(4106.86,1728.14) 5632,1728.14 5680,1776.14 p2.1
Netp3_1: p3.1 U5.6 U5.7 | length 2114.7
  Top Layer w10: U5.7 U5.6 5312,2430 5326,2416 v1(5326,2254)
  Bottom Layer w10: p3.1 4128,1480 4083,1525 4083,1738.84 4096,1751.84 4823.84,1751.84 v1(5326,2254)
NetPR1_3: PR1.3 U6.15 | length 655.5
  Top Layer w10: U6.15 4190,2195 4405,1980 PR1.3
NetR1_2: R1.2 U2.2 | length 262.7
  Bottom Layer w10: R1.2@2690,3550 2821.32,3550 2864,3592.68 U2.2
NetR2_2: R2.2 U4.20 | length 163.8
  Top Layer w10: U4.20 3508.5,2425 3569.57,2486.06 R2.2@3569.57,2490
NetR7_1: R7.1 U6.12 | length 383.6
  Top Layer w10: R7.1@3785,1714.57 3904,1714.57 3939,1749.57 3939,1814.36 3877.36,1876 U6.12
NetR8_1: R8.1 U4.44 | length 374.1
  Top Layer w10: R8.1@2820.43,2475 2820.43,2400 2855.43,2365 U4.44
NetR10_1: R10.1 RP2.1 | length 346.7
  Top Layer w10: R10.1@5040,2159.57 5122.43,2159.57 5170,2112 RP2.1
NetR10_2: R10.2 U5.3 | length 297.3
  Top Layer w10: R10.2@5040,2230.43 5008,2230.43 4990.7,2247.74 4990.7,2428.7 4992,2430 U5.3
NetR13_1: R13.1 R14.1 U5.2 | length 364.1
  Top Layer w10: R14.1@4875,2684.57 4875,2614.43 4885.43,2604 4885.43,2535 4885.43,2496 4901.43,2480 U5.2
NetR14_2: R14.2 RP?.3 | length 337
  Top Layer w10: R14.2@4875,2755.43 4875,3050 RP?.3
NetRP2_2: RP2.2 RP2.3 U5.1 U5.5 | length 884.6
  Top Layer w10: U5.1 5126,2530 5160,2496 5160,2432 5212,2380 U5.5 RP2.3
  Bottom Layer w10: RP2.3 RP2.2
NRST: C16.2 R11.1 U4.7 | length 469.6
  Top Layer w10: C16.2@3115,2015 3137,2015 3207,1945 3230,1945 3264,1945 3280,1961 U4.7
OSC-IN: C15.2 U4.5 Y1.2 | length 1017.8
  Top Layer w10: C15.2@2730,1589.57 2722.43,1589.57 2689,1623 2689,1849 Y1.2 3001.95,2161.95 3014.47,2161.95 3026.53,2174 3232,2174 3240,2182 U4.5
OSC-OUT: C17.1 U4.6 Y1.1 | length 1000.1
  Top Layer w10: v1(2930,1545) C17.1@2930,1584.57 ; Y1.1 2935,2056 2976,2097 3213,2097 3260,2144 U4.6
  Bottom Layer w10: v1(2930,1545) 2935,1550 Y1.1
R\E\S\: U2.11 U4.28 | length 1015.2
  Top Layer w10: v1(3209,3192) 3209,2921 3320,2810 U4.28
  Bottom Layer w10: U2.11 3056.35,3344.65 v1(3209,3192)
SCLK: P1.4 U4.37 | length 354.1
  Top Layer w10: P1.4 3100,2550 3100,2505 U4.37
SDA: U2.10 U4.27 | length 1169
  Top Layer w10: U4.27 3340,2823 v1(3345,2828)
  Bottom Layer w10: U2.10 3088.8,3372.2 3231.84,3229.16 3231.84,3069.69 3193.51,3031.35 3193.51,2871.89 3206.89,2858.51 3232.51,2858.51 3263.01,2828 v1(3345,2828)
SDIO: P1.3 U4.34 | length 376.1
  Top Layer w10: P1.3 3028,2722 3168,2722 3200,2690 U4.34
SLC: U2.9 U4.26 | length 1989.2
  Top Layer w10: v1(3107,3579) 3107,3687.46 3239.54,3820 3362.14,3820 3368,3814.14 3368,2818 3360,2810 U4.26
  Bottom Layer w10: U2.9 3028,3399.76 3107,3478.76 v1(3107,3579)
SYSCLK: CR1.5 U6.9 | length 622.6
  Top Layer w10: v1(3652,1815) 3652,1605 CR1.5 ; v1(3769.08,2049.08) 3771.71,2049.08 3787.7,2033.09 3791.93,2033.09 3800.59,2024.43 U6.9
  Bottom Layer w10: v1(3652,1815) 3652,1932 v1(3769.08,2049.08)
USB-D-N: U4.32 USB1.A7 USB1.B7 | length 1929.4
  Top Layer w10: v1(3216.35,2881.35) 3245.53,2852.17 3245.53,2722.63 3240,2717.1 U4.32 ; USB1.A7 4082.04,3690.78 4082.04,3715.07 4089.66,3722.69 4112.24,3722.69 4119.85,3715.07 4119.85,3690.78 USB1.B7 4120.63,3657.31 4172.06,3605.89 4172.06,3371.06 v1(4123,3322)
  Bottom Layer w10: v1(3216.35,2881.35) 3311.35,2881.35 3752,3322 v1(4123,3322)
USB-D-P: R16.1 U4.33 USB1.A6 USB1.B6 | length 2609.6
  Top Layer w10: U4.33 3220,2722.56 3227.53,2730.09 3227.53,2808 3186,2849.53 3186,3741 3245,3800 3305,3800 3326,3779 v1(3326,3520) ; v1(3985,3520) 4064.57,3520 4064.57,3662.72 ; USB1.B6 4061.58,3665.71 4064.57,3662.72 ; USB1.A6 4100.95,3665.71 4092.55,3657.31 4069.97,3657.31 4064.57,3662.72
  Bottom Layer w10: v1(3326,3520) v1(3985,3520)
VCC: C3.1 C4.1 C20.2 C21.2 R2.1 R11.2 R15.2 U1.4 U1.5 U2.3 U2.4 U4.9 U4.24 U4.36 U4.48 | length 6754.2
  Top Layer w10: v1@2951,2184.95 3004.95,2184.95 U4.48 ; U4.36 3160.38,2559.62 3160.38,2518.75 3174.13,2505 U4.24 ; v1(3310,2135) 3310,2135.7 3320,2145.7 U4.9
  Top Layer w20: C20.2@2870.06,2184.95 v1(2946,2184.95) ; R11.2@3230,2015.87 v1(3230,2057) ; U4.24@3435,2510 3435,2705 3500,2770 3560,2770 3640.43,2689.57 ; v1(3640.43,2333) 3640.43,2490 3640.43,2689.57 ; v1(3666,3819) 3666,2875 3640.43,2849.43 3640.43,2689.57 ; v1(4590,3571) 4646,3515 U1.5 ; U1.4 U1.5 ; R15.2@4997.57,3540 4875.09,3540 C4.1 4827.21,3542.09 4800.56,3515.43 4743,3515.43 4658.43,3515.43 U1.5
  Bottom Layer w20: U2.3 U2.4 2962.15,3537.56 2964.27,3539.68 U2.3@2964.27,3562.99 ; v1@2951,2184.95 3078.95,2057 v1(3230,2057) 3308,2135 v1(3310,2135) 3310,2137 3506,2333 v1(3640.43,2333) ; U2.3@2984.06,3566.8 3001.51,3566.8 3012.06,3577.35 ; v1(4590,3571) 4342,3819 v1(3666,3819) ; 3012.06,3577.35 3012.06,3597.05 ; 3012.06,3577.35 3012.06,3597.06 ; 3012.06,3597.06 3234,3819 ; 3012.06,3597.05 3234,3819 ; 3234,3819 3260,3845 3640,3845 v1(3666,3819) ; 3234,3819 v1(3666,3819)
pads on no net: CR1.1 S1.3 S1.4 S1.5 S1.6 S1.7 U3.1 U3.7 U4.1 U4.2 U4.3 U4.4 U4.22 U4.29 U4.30 U4.31 U4.38 U4.39 U4.40 U6.13 U6.17 USB1.0 USB1.1 USB1.2 USB1.3 USB1.4 USB1.A5 USB1.A8 USB1.B5 USB1.B8
copper on no net:
  other v2: 4480,3850 4600,3850

## Polygon pours and split planes (outlines as drawn)
GND on Top Layer "GND_L01_P000" (solid, remove dead copper, pour order 0): 1970,3935 1970,1190 1975,1185 5900,1185 5900,3940 5895,3935

## Keep-outs
Keep-Out Layer:
  lines w10: 1968.5,1181.1 2952.76,1181.1 4921.26,1181.1 5905.51,1181.1 5905.51,3937.01 1968.5,3937.01 1968.5,1181.1

## Other copper
Top Layer:
  pour cut-out: 1993.99,3911.52 1985.08,2845 3157.22,2845 3160,2842.22 3160,3911.52

## Silkscreen, mask and mechanical layers (free items; w line width, h text height)
Top Overlay:
  lines w10: 1554.8,1241.1 1574.8,1181.1 ; 1554.8,3877.01 1574.8,3937.01 ; 1564.8,1181.1 1584.8,1181.1 ; 1564.8,3937.01 1584.8,3937.01 ; 1574.8,2451.5 1574.8,1181.1 ; 1574.8,2666.61 1574.8,3937.01 ; 1594.8,1241.1 1574.8,1181.1 ; 1594.8,3877.01 1574.8,3937.01 ; 1968.5,4320.71 1968.5,4340.71 ; 2028.5,4310.71 1968.5,4330.71 ; 2028.5,4350.71 1968.5,4330.71 ; 3816.19,4330.71 1968.5,4330.71 ; 4057.83,4330.71 5905.51,4330.71 ; 5845.51,4310.71 5905.51,4330.71 ; 5845.51,4350.71 5905.51,4330.71 ; 5905.51,4320.71 5905.51,4340.71
  text "100 (mm)" at 3826.19,4305.56 h60
  text "70 (mm)" at 1599.95,2461.5 h60 r90
  text "IN PUT" at 5530,2065 h60
  text "OUT PUT" at 4510,1285 h60 r90
Top Paste:
  circle w59.06: c5775,3810 r29.53
  circle w59.06: c5775,1305 r29.53
  circle w59.06: c2095,3815 r29.53
  circle w59.06: c2095,1310 r29.53
Top Solder:
  rectangle: 3965,3775 4215,3925
Mechanical 1:
  lines w10: 3284.08,3779.54 3284.08,2905.92 3264.08,2905.92 3264.08,3780 3285,3780

## Text inside footprints (layer, text, board x,y; h text height)
U2: Top Overlay "12" at 2909,3171.09 h45 r90; Top Overlay "1" at 2902,3680.09 h45 r90; Top Overlay "IPS_1.3" at 3178,3308.09 h71.81 r90